# EAGLE board soic-8 breakout (EAGLE 9.2.2)
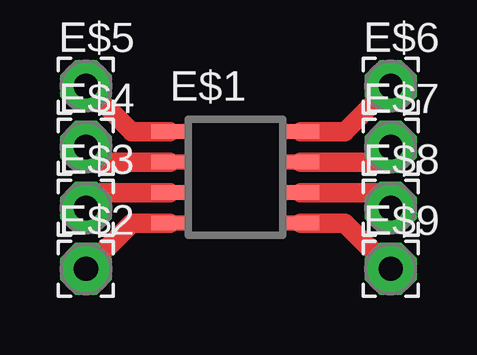
[diagram p0: board, top side]

No outline drawn. Coordinates in mm, seen from the top.
Copper layers (1*16): Top 0.035mm / dielectric 1.5mm / Bottom 0.035mm
Design rules "default": minimum track width 6mil, minimum drill 0.35mm, track to track 6mil, track to pad 6mil, pad to pad 6mil, via to via 6mil, smd to smd 6mil, copper to edge 40mil, drill to drill 6mil, minimum pad ring 10mil, minimum via ring 8mil, stop-mask expansion 4mil, vias tented up to drill 0mil, thermal gap 10mil

## Footprints (pad centres in the part's own frame; a part is rotated, then mirrored left to right if it is on the bottom)
SOIC-8 = smd 1.524 x 0.61: 1 0,3.81; 2 0,2.54; 3 0,1.27; 4 0,0; 5 5.461,0; 6 5.461,1.27; 7 5.461,2.54; 8 5.461,3.81
2,15/1,0 = drill 1.016 pad 2.159 octagon: 1 0,0

## Placement (x,y rotation side)
E$1  [SOIC-8]  6.03,5.71 0 top
E$2  [2,15/1,0]  2.54,3.81 0 top
E$3  [2,15/1,0]  2.54,6.35 0 top
E$4  [2,15/1,0]  2.54,8.89 0 top
E$5  [2,15/1,0]  2.54,11.43 0 top
E$6  [2,15/1,0]  15.24,11.43 0 top
E$7  [2,15/1,0]  15.24,8.89 0 top
E$8  [2,15/1,0]  15.24,6.35 0 top
E$9  [2,15/1,0]  15.24,3.81 0 top

## Library data of the parts
E$1 = my library
E$2-E$9 = wirepad

## Nets
S$1: E$1.1 E$5.1
S$4: E$1.2 E$4.1
S$5: E$1.3 E$3.1
S$6: E$1.4 E$2.1
S$7: E$1.5 E$9.1
S$8: E$1.6 E$8.1
S$9: E$1.7 E$7.1
S$10: E$1.8 E$6.1

## Tracks (layer width: path | path; a pad name or v marks a point on that pad's centre or on a via)
S$1
  Top 0.813: E$5.1 4.45,9.53 E$1.1
S$4
  Top 0.813: E$4.1 3.17,8.26 E$1.2
S$5
  Top 0.813: E$3.1 3.17,6.99 E$1.3
S$6
  Top 0.813: E$2.1 4.45,5.71 E$1.4
S$7
  Top 0.813: E$9.1 13.34,5.71 E$1.5
S$8
  Top 0.813: E$8.1 14.61,6.99 E$1.6
S$9
  Top 0.813: E$7.1 14.61,8.26 E$1.7
S$10
  Top 0.813: E$6.1 13.34,9.53 E$1.8